# Altium PCB Amplifier.PcbDoc
Units mm, origin at the board's own origin, x right, y up, seen from the top; angles counter-clockwise.
Board outline 76.8 x 27.3 mm, 2 copper layers (Top Layer, Bottom Layer), stack 0.373 mm thick; 49 components, 17 nets, 109 pads, 210 vias.
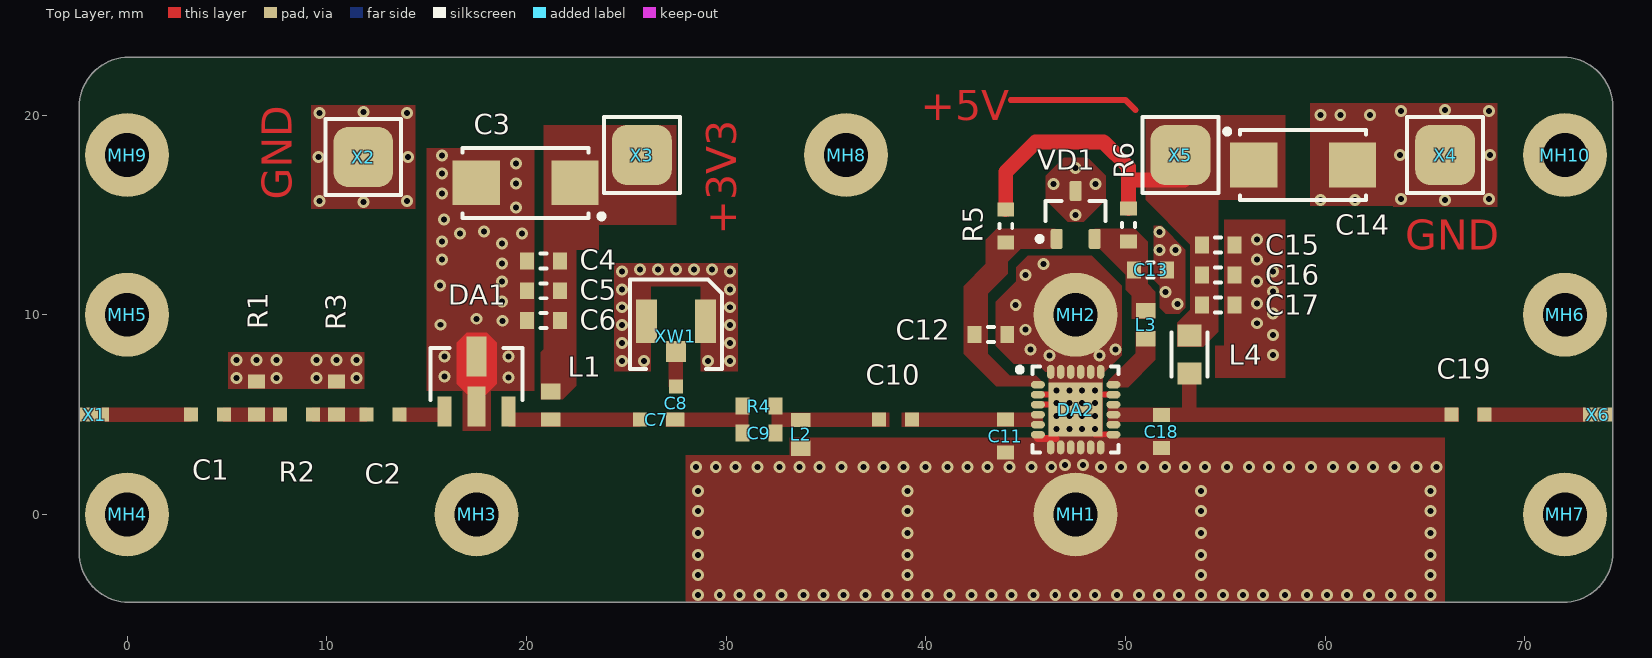
[diagram p0: Top Layer view]
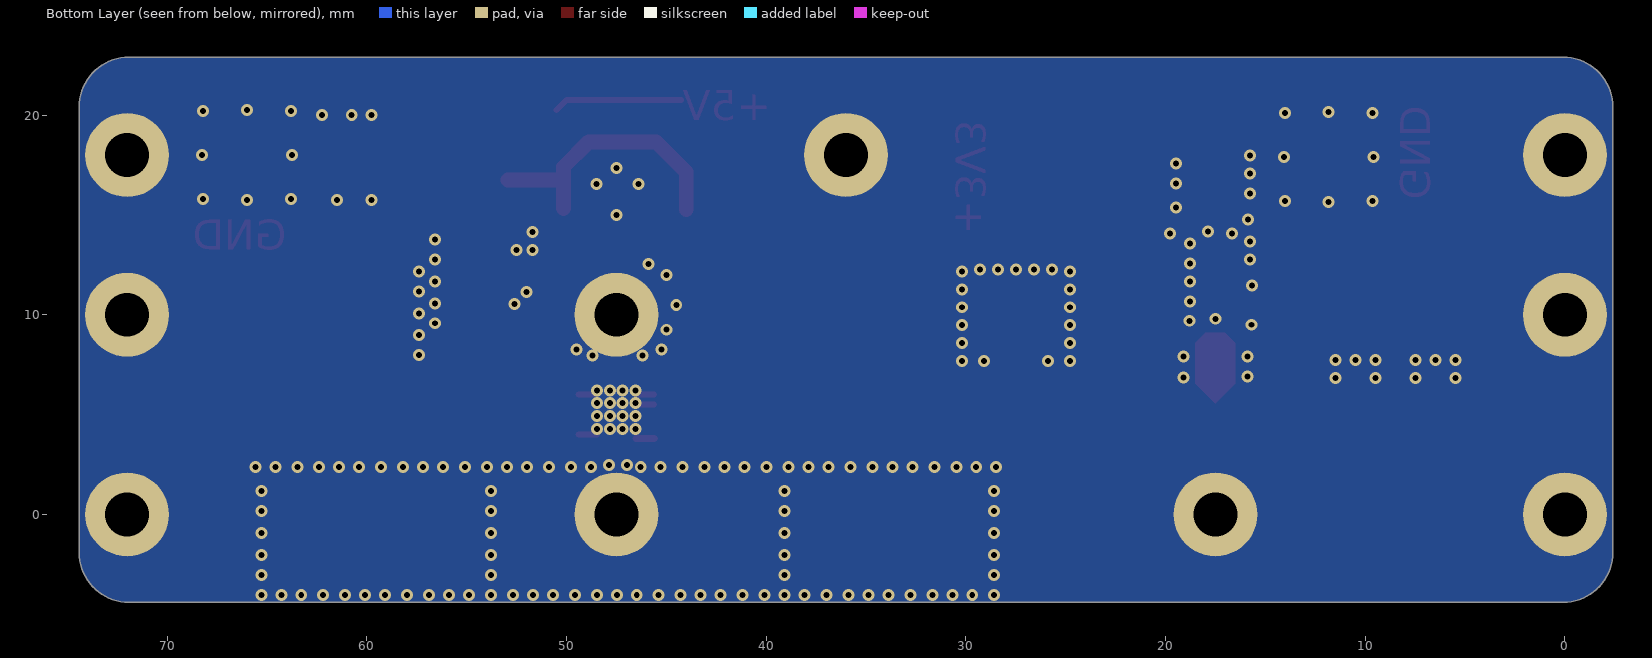
[diagram p1: Bottom Layer view, seen from below]
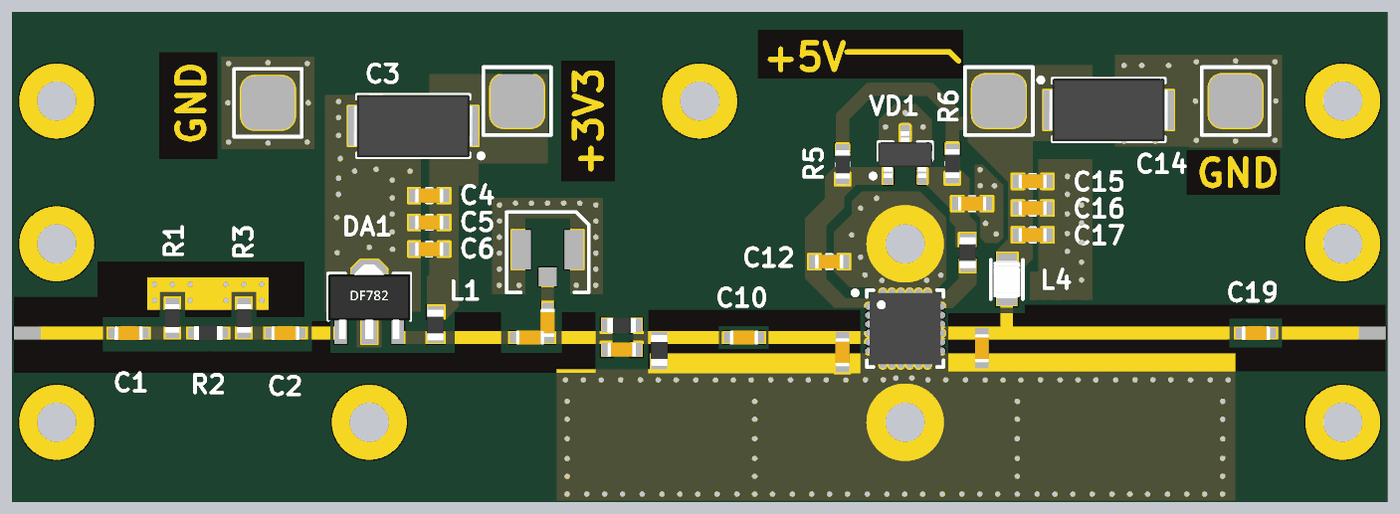
[diagram p2: 3D render of the assembled board from above, using the file's embedded part models]

## Layer stack, top to bottom
Top Solder: solder mask 0.0254, SM-001, Dk 4
Top Layer: signal copper 0.0175
Core: core 0.338, WL-CT350, Dk 3.66
Bottom Layer: signal copper 0.0175

## Board outline
0.1,-4.4 cw(c0.1,-1.9) -2.4,-1.9 -2.4,20.4 cw(c0.1,20.4) 0.1,22.9 71.9,22.9 cw(c71.9,20.4) 74.4,20.4 74.4,-1.9 cw(c71.9,-1.9) 71.9,-4.4

## Design rules (kind name [scope] priority, off if disabled: settings)
BoardOutlineClearance [All] p1: gap=0.3 ignorepadtopadclearanceinfootprint=FALSE except(0: Arc-SplitContinuation Track-SplitContinuation SMDPad-OutlineEdge SMDPad-CutoutEdge SMDPad-SplitContinuation THPad-SplitContinuation Via-SplitContinuation Fill-SplitContinuation Poly-CavityEdge Poly-CutoutEdge Poly-SplitBarrior Poly-SplitContinuation Region-SplitContinuation Text-SplitContinuation; 0.001: Poly-OutlineEdge)
Clearance ClearancePoly [InPoly] p1: gap=0.18 ignorepadtopadclearanceinfootprint=FALSE except(0: Arc-Hole Track-Hole SMDPad-Hole THPad-Hole Via-Hole Fill-Hole Poly-Hole Region-Hole Text-Hole; 0.2: Arc-Fill Arc-Poly Arc-Region Track-Fill Track-Poly Track-Region)
Clearance [All] p2: gap=0.16 ignorepadtopadclearanceinfootprint=TRUE except(0: Arc-Hole Track-Hole SMDPad-Hole THPad-Hole Via-Hole Fill-Hole Poly-Hole Region-Hole Text-Hole)
DiffPairsRouting [All] p1: maxlimit=0.254 minlimit=0.2 mostfreqgap=0.23 toplayer_minwidth=0.2 toplayer_maxwidth=0.381 toplayer_prefwidth=0.205 bottomlayer_minwidth=0.2 bottomlayer_maxwidth=0.381 bottomlayer_prefwidth=0.205 maxuncoupledlength=12.7
HoleSize [All] p1: absolutevalues=TRUE maxlimit=4.5 minlimit=0.025 maxpercent=80.000 minpercent=20.000
MinimumSolderMaskSliver [All] p1: minsoldermaskwidth=0.1
PolygonConnect PolygonConnectDirect [IsVia or IsNamedPolygon('Direct')] p1: connectstyle=Direct reliefconductorwidth=0.254 reliefentries=4 polygonreliefangle="90 Angle" airgapwidth=0.254
PolygonConnect [All] p2: connectstyle=Relief reliefconductorwidth=0.254 reliefentries=4 polygonreliefangle="90 Angle" airgapwidth=0.254
RoomDefinition LNA [InComponentClass('LNA')] p1: confinementstyle=ConfineIn formatcopy=TRUE lockcomponents=FALSE outline 2.274,3.746 2.274,5.754 5.474,5.754 5.474,7.329 9.474,7.329 14.546,7.329 14.546,9.779 15.769,9.779 15.769,18.881 24.762,18.881 24.762,14.323 22.612,14.323 22.612,10.198 22.612,8.698 22.237,8.698 22.237,3.698 20.179,3.698 20.179,3.721 14.546,3.721 2.274,3.721 2.274,3.746
RoomDefinition Power [InComponentClass('Power')] p2: confinementstyle=ConfineIn formatcopy=TRUE lockcomponents=FALSE outline 24.754,3.747 24.754,5.755 24.829,5.755 24.829,12.13 42.996,12.13 42.996,16.204 45.196,16.204 45.196,17.204 54.086,17.204 54.086,19.779 63.079,19.779 63.079,6.004 68.894,6.004 68.894,3.996 52.8,3.996 52.8,2.396 50.354,2.396 44.989,2.396 44.989,2.171 42.981,2.171 42.981,2.272 32.704,2.272 32.704,3.072 29.879,3.072 29.879,3.747
RoutingVias [All] p1: holewidth=0.3 width=0.7 viastyle="Through Hole" minholewidth=0.3 minwidth=0.6 maxholewidth=0.3 maxwidth=0.7
SilkToSilkClearance [All] p1: silktosilkclearance=0.2
SilkToSolderMaskClearance [IsPad] p1: minsilkscreentomaskgap=0.18 clearancetoexposedcopper=TRUE
SolderMaskExpansion SolderMaskExpansion_1 [IsVia] p1: expansion=0.102 istentingtop=TRUE
SolderMaskExpansion [All] p2: expansion=0.07 istentingtop=FALSE
Width [All] p1: maxlimit=1 minlimit=0.2 preferedwidth=0.3
25 further rules are at their usual default settings.

## Classes and differential pairs
component class Power: C7 C8 C9 C10 C11 C12 C13 C14 C15 C16 C17 C18 C19 DA2 L2 L3 L4 R4 R5 R6 VD1 XW1
component class LNA: C1 C2 C3 C4 C5 C6 DA1 L1 R1 R2 R3
net class 50R: NetC1_1 NetC1_2 NetC2_1 NetC2_2 NetC7_1 NetC7_2 NetC8_2 NetC9_1 NetC10_1 NetC18_2 NetC19_2

## Components (designator, comment, footprint, x,y, rotation, side; value= is the part's Value field where it differs from the comment)
C1 "*" CAPC1608X05N#1 4.028,5 r0 top value=100
C2 "*" CAPC1608X05N#1 12.808,5 r0 top value=100
C3 "*" CAPMP6032X25N-C 19.958,16.602 r180 top value=10u
C4 "*" CAPC1608X05N#2 20.858,12.702 r0 top value=1000
C5 "*" CAPC1608X05N#2 20.858,11.202 r0 top value=100
C6 "*" CAPC1608X05N#2 20.858,9.702 r180 top value=22
C7 "*" CAPC1608X05N#1 26.508,4.751 r0 top value=100
C8 "*" CAPC1608X05N#3 27.483,5.576 r90 top value=100
C9 "*" CAPC1608X05N#2 31.633,4.076 r180 top value=22
C10 "*" CAPC1608X05N#1 38.478,4.75 r180 top value=1.8
C11 "*" CAPC1608X05N#2 43.985,3.925 r90 top value=6.8
C12 "*" CAPC1608X05N#2 43.25,9 r180 top value=100
C13 "*" CAPC1608X05N#2 51.25,12.25 r180 top value=0.1u
C14 "*" CAPMP6032X25N-C 58.89,17.5 r0 top value=10u
C15 "*" CAPC1608X05N#2 54.64,13.5 r0 top value=1000
C16 "*" CAPC1608X05N#2 54.64,12 r0 top value=100
C17 "*" CAPC1608X05N#2 54.64,10.5 r180 top value=22
C18 "*" CAPC1608X05N#2 51.796,4.15 r90 top value=5.1
C19 "*" CAPC1608X05N#1 67.14,5 r0 top value=100
DA1 "PGA-102+" SOT89-DF782-160P410X160-3N 17.5,6.5 r90 top
DA2 "TQP7M9104" QFN50P400X400X85_HS-25N 47.5,5.25 r0 top
L1 "I1608" INDC1608X08N#1 21.208,5.452 r270 top value=18n
L2 "I1608" INDC1608X08N#2 33.733,4.026 r270 top value=3.6n
L3 "I1608" INDC1608X08N#3 51,9.5 r270 top value=120n
L4 "LQW2BHN10NJ13L" LQW2BH 53.19,8 r270 top value=10n
MH1 "Винт DIN912 М2" "DIN 912 M2 Electro" 47.5,0 r0 top
MH2 "Винт DIN912 М2" "DIN 912 M2 Electro" 47.5,10 r0 top
MH3 "Винт DIN912 М2" "DIN 912 M2 Electro" 17.5,0 r0 top
MH4 "Винт DIN912 М2" "DIN 912 M2 Electro" 0,0 r0 top
MH5 "Винт DIN912 М2" "DIN 912 M2 Electro" 0,10 r0 top
MH6 "Винт DIN912 М2" "DIN 912 M2 Electro" 72,10 r0 top
MH7 "Винт DIN912 М2" "DIN 912 M2 Electro" 72,0 r0 top
MH8 "Винт DIN912 М2" "DIN 912 M2 Electro" 36,18 r0 top
MH9 "Винт DIN912 М2" "DIN 912 M2 Electro" 0,18 r0 top locked
MH10 "Винт DIN912 М2" "DIN 912 M2 Electro" 72,18 r0 top locked
R1 "R1608" RESC1608X05N#1 6.478,5.825 r90 top value=432
R2 "R1608" RESC1608X05N#2 8.478,5 r180 top value=11.5
R3 "R1608" RESC1608X05N#1 10.478,5.825 r90 top value=432
R4 "R1608" RESC1608X05N#1 31.633,5.426 r180 top value=51
R5 "R1608" RESC1608X05N#1 44,14.45 r90 top value=220
R6 "R1608" RESC1608X05N#1 50.14,14.5 r90 top value=110
VD1 "SM05T1G" SOT95P232X100-3N 47.5,15 r90 top
X1 "EdgeConnector" "Edge 704" -2.4,5 r0 top (schematic designator X5)
X2 "1PINS" 1Pin-3x3 11.828,17.9 r0 top (schematic designator X1)
X3 "1PINS" 1Pin-3x3 25.778,18 r0 top (schematic designator X2)
X4 "1PINS" 1Pin-3x3 66,18 r0 top (schematic designator X3)
X5 "1PINS" 1Pin-3x3 52.75,18 r0 top (schematic designator X4)
X6 "EdgeConnector" "Edge 704" 74.4,5 r180 top
XW1 "TE 1909763-1" "UMCC TE 1909763-1" 27.483,9.676 r0 top (schematic designator XW2)

## Footprints (in the part's own frame and the unit in brackets; to place one, negate y for a bottom-side part, rotate by r counter-clockwise, add the part's x,y. Pads: shape width x height; smd on the part's side, far side on the other; paste and mask are expansions set on the pad)
1Pin-3x3 [mm] "SMD solder point 3x3 mm"
  rrect50% 3x3 smd: 1(0,0)
  silkscreen extent -1.9,-1.9 1.9,1.9
CAPC1608X05N#1 [mm] "Chip Capacitor, 2-Leads, Body 1.60x0.80mm, IPC Medium Density"
  rect 0.7x0.704 smd paste-0.05: 1(-0.825,0) 2(0.825,0)
  body extent -0.8,-0.4 0.8,0.4, height 0.5
CAPC1608X05N#2 [mm] "Chip Capacitor, 2-Leads, Body 1.60x0.80mm, IPC Medium Density"
  rect 0.7x0.85 smd paste-0.05: 1(-0.825,0) 2(0.825,0)
  silkscreen extent -0.15,-0.38 0.15,0.38, body extent -0.8,-0.4 0.8,0.4, height 0.5
CAPC1608X05N#3 [mm] "Chip Capacitor, 2-Leads, Body 1.60x0.80mm, IPC Medium Density"
  rect 0.7x0.85 smd paste-0.05: 1(-0.825,0)
  rect 0.7x0.704 smd paste-0.05: 2(0.825,0)
  body extent -0.8,-0.4 0.8,0.4, height 0.5
CAPMP6032X25N-C [mm] "Molded Capacitor, 2-Leads, Body 6.00x3.20mm, IPC Medium Density"
  rect 2.37x2.23 smd: 1(-2.47,0) 2(2.47,0)
  silkscreen extent -3.93,-1.75 3.15,1.8, body extent -3.37,-1.75 3.37,1.75, height 2.5
"DIN 912 M2 Electro" [mm] "Винт DIN 912 цилиндрическая головка внутренний шестигранник M2"
  round 4.2 hole 2.2 mask+0.07: MH0(0,0)
"Edge 704" [mm] "Полосок 0,704 мм"
  rect 1.5x0.704 smd mask+0.07: 1(0.75,0)
INDC1608X08N#1 [mm] "Chip Inductor, 2-Leads, Body 1.60x0.80mm, IPC Medium Density"
  rect 0.79x0.98 smd paste-0.04 mask+0.07: 1(-0.705,0)
  rect 0.704x0.98 smd paste-0.04 mask+0.07: 2(0.705,0)
  body extent -0.87,-0.48 0.87,0.48, height 0.8
INDC1608X08N#2 [mm] "Chip Inductor, 2-Leads, Body 1.60x0.80mm, IPC Medium Density"
  rect 0.704x0.98 smd paste-0.04 mask+0.07: 1(-0.705,0)
  rect 0.79x0.98 smd paste-0.04 mask+0.07: 2(0.705,0)
  body extent -0.87,-0.48 0.87,0.48, height 0.8
INDC1608X08N#3 [mm] "Chip Inductor, 2-Leads, Body 1.60x0.80mm, IPC Medium Density"
  rect 0.79x0.98 smd paste-0.04 mask+0.07: 1(-0.705,0) 2(0.705,0)
  body extent -0.87,-0.48 0.87,0.48, height 0.8
LQW2BH [mm] "Chip Inductor, 2-Leads, Body 2.0x1.50mm, IPC Medium Density"
  rect 1.1x1.2 smd paste-0.04 mask+0.07: 1(-0.95,0) 2(0.95,0)
  silkscreen extent -1.1,-0.9 1.1,0.9, body extent -1.05,-0.75 1.05,0.75, height 1.7
QFN50P400X400X85_HS-25N [mm] "QFN, 24-Leads, Body 4,00x4,00mm, Pitch 0,50mm, Thermal Pad 2,70x2,70mm, IPC Medium Density"
  oval 0.7x0.38 smd: 1(-1.89,1.25) 2(-1.89,0.75) 3(-1.89,0.25) 4(-1.89,-0.25) 5(-1.89,-0.75) 6(-1.89,-1.25) 13(1.89,-1.25) 14(1.89,-0.75) 15(1.89,-0.25) 16(1.89,0.25) 17(1.89,0.75) 18(1.89,1.25)
  oval 0.38x0.7 smd: 7(-1.25,-1.89) 8(-0.75,-1.89) 9(-0.25,-1.89) 10(0.25,-1.89) 11(0.75,-1.89) 12(1.25,-1.89) 19(1.25,1.89) 20(0.75,1.89) 21(0.25,1.89) 22(-0.25,1.89) 23(-0.75,1.89) 24(-1.25,1.89)
  rect 2.7x2.7 smd: 25(0,0)
  silkscreen extent -2.92,-2.15 2.15,2.15, body extent -2.01,-2.01 2.01,2.01, height 0.85
RESC1608X05N#1 [mm] "Chip Resistor, 2-Leads, Body 1.60x0.80mm, IPC Medium Density"
  rect 0.7x0.85 smd paste-0.05: 1(-0.825,0) 2(0.825,0)
  body extent -0.8,-0.4 0.8,0.4, height 0.45
RESC1608X05N#2 [mm] "Chip Resistor, 2-Leads, Body 1.60x0.80mm, IPC Medium Density"
  rect 0.7x0.704 smd paste-0.05: 1(-0.825,0) 2(0.825,0)
  body extent -0.8,-0.4 0.8,0.4, height 0.45
SOT89-DF782-160P410X160-3N [mm] "SOT89, 3-Leads, Body 4,50x2,45mm, Pitch 1,60mm, Lead Span 4,1mm, IPC Medium Density"
  rect 1.5x0.7 smd: 1(-1.35,1.6) 3(-1.35,-1.6)
  rect 2x0.9 smd: 2(-1.1,0)
  rect 2x1 smd mask+0.07: 4(1.4,0)
  Top Layer region: -0.95,0 0.05,1 2.1,1 2.6,0.5 2.6,-0.5 2.1,-1 0.05,-1
  silkscreen extent -0.76,-2.3 1.84,2.3, body extent -1.84,-2.3 2.36,2.3, height 1.6
SOT95P232X100-3N [mm] "SOT23, 3-Leads, Body 2.92x2.32mm, Pitch 0.95mm, IPC Medium Density"
  rrect30% 1x0.6 smd paste-0.03: 1(-1.2,0.95) 2(-1.2,-0.95) 3(1.2,0)
  silkscreen extent -1.32,-1.5 0.7,1.92, body extent -1.32,-1.52 1.32,1.52, height 1
"UMCC TE 1909763-1" [mm]
  rect 1x1.05 smd mask+0.07: 1(0,-1.525)
  rect 1.05x2.2 smd mask+0.07: 2(-1.475,0) 2(1.475,0)
  Top Layer pour cut-out: -0.95,-1 -0.95,1.5 0.95,1.5 0.95,-1
  silkscreen extent -2.3,-2.4 2.3,2.1, body extent -1.5,-1.55 1.5,1.55, height 1.23

## Part data
C1 C2 C5 C7 C8 C12 C16 C19: library part CC1608, "Конденсатор 1.6x0.8 мм", Manufacturer="Murata Electronics", Manufacturer Part Number=GCM1885C2A101FA16D, Supplier Part Number 1=C527967, Tolerance=±1%, Voltage=100, Supplier 1=LCSC, РКД Наименование="CC1608M - NP0 - 100 V - 100 pF ±1%", ТКЕ=C0G
  C1 C2 C5: ClassName=LNA
  C7 C8 C12 C16 C19: ClassName=Power
C3 C14: library part CT6032-C, "Tantalum Surface Mount Capacitor, Size C", Manufacturer="Vishay Intertech", Manufacturer Part Number=293D106X9016C2TE3, Supplier Part Number 1=C130372, Voltage=16, Supplier 1=LCSC
  C3: ClassName=LNA
  C14: ClassName=Power
C4 C15: library part CC1608, "Конденсатор 1.6x0.8 мм", Manufacturer="Murata Electronics", Manufacturer Part Number=GRM1885C1H102JA01D, Supplier Part Number 1=C77026, Tolerance=±5%, Voltage=50, Supplier 1=LCSC, РКД Наименование="CC1608M - NP0 - 50 V - 1 nF ±5%", ТКЕ=C0G
  C4: ClassName=LNA
  C15: ClassName=Power
C6 C9 C17: library part CC1608, "Конденсатор 1.6x0.8 мм", Manufacturer="Vishay Intertech", Manufacturer Part Number=VJ0603A220FXACW1BC, Supplier Part Number 1=C2182228, Tolerance=±1%, Voltage=50, Supplier 1=LCSC, РКД Наименование="CC1608M - NP0 - 50 V - 22 pF ±1%", ТКЕ=C0G
  C6: ClassName=LNA
  C9 C17: ClassName=Power
C10: library part CC1608, "Конденсатор 1.6x0.8 мм", Manufacturer=YAGEO, Manufacturer Part Number=CC0603BRNPO9BN1R8, Supplier Part Number 1=C282244, Tolerance="±0.1 pF", Voltage=50, ClassName=Power, Supplier 1=LCSC, РКД Наименование="CC1608M - NP0 - 50 V - 1.8 pF ±0.1pF", ТКЕ=C0G
C11: library part CC1608, "Конденсатор 1.6x0.8 мм", Manufacturer=YAGEO, Manufacturer Part Number=CC0603BRNPO9BN6R8, Supplier Part Number 1=C519114, Tolerance=±0.1pF, Voltage=50, ClassName=Power, Supplier 1=LCSC, РКД Наименование="CC1608M - NP0 - 50 V - 6.8 pF ±0.1 pF", ТКЕ=C0G
C13: library part CC1608, "Конденсатор 1.6x0.8 мм", Manufacturer="Murata Electronics", Manufacturer Part Number=GRM188R71H104KA93D, Supplier Part Number 1=C77055, Tolerance=±10%, Voltage=50, ClassName=Power, Supplier 1=LCSC, РКД Наименование="CC1608M -X7R - 50 V - 0.1 uF ±10%", ТКЕ=X7R
C18: library part CC1608, "Конденсатор 1.6x0.8 мм", Manufacturer=YAGEO, Manufacturer Part Number=CC0603BRNPO9BN5R1, Supplier Part Number 1=C519110, Tolerance="±0.1 pF", Voltage=50, ClassName=Power, Supplier 1=LCSC, РКД Наименование="CC1608M - NP0 - 50 V - 5.1 pF ±0.1 pF", ТКЕ=C0G
DA1: "MonolithicAmplifier, UltraHighDynamicRange, 50ohm, 0.05 to 6 GHz", Manufacturer=Mini-Circuits, Supplier Part Number 1=C3193264, Category="RF Amplifiers", ClassName=LNA, Manufacturer Part Number=PGA-102+, Pricing 1="1=3,25, 10=3,1, 20=2,952, 50=2,112, 100=2,028, 200=1,944, 500=1,86 (USD)", RoHS=Yes, RoHS Compliant=Yes, Stock 1=4202, Supplier 1=LCSC
DA2: "RF Amp Single Driver Amp 2.2GHz 5.25V 24-Pin QFN EP", Manufacturer=Qorvo, Supplier Part Number 1=C471175, Category="RF Amplifiers", ClassName=Power, Manufacturer Part Number=TQP7M9104, Pricing 1="1=17,08, 10=17,08, 50=12,4, 100=10,06, 1000=6,78, 10000=6,65 (USD)", RoHS=Yes, Stock 1=3113, Supplier 1=LCSC
L1: "Катушка 1.6x0.8 мм", Manufacturer=FH, Manufacturer Part Number=FHW0603UC018JST, Supplier Part Number 1=C295695, ClassName=LNA, Supplier 1=LCSC
L2: "Катушка 1.6x0.8 мм", Manufacturer=FH, Manufacturer Part Number=FHW0603UC3N6JST, Supplier Part Number 1=C304270, ClassName=Power, Supplier 1=LCSC
L3: "Катушка 1.6x0.8 мм", Manufacturer=FH, Manufacturer Part Number=FHW0603UCR12JST, Supplier Part Number 1=C317988, ClassName=Power, Supplier 1=LCSC
L4: "Inductor RF Chip Wirewound 10nH 5% 100MHz 35Q-Factor 1.32A 30mOhm DCR 0805 Embossed T/R", Case Code (Imperial)=0805, Case Code (Metric)=2012, Current Rating=1.32A, DC Resistance (DCR)=30mR, Inductance=10n, Manufacturer=Murata, Max Operating Temperature=85°C, Min Operating Temperature=-40°C, Package Quantity=2000, Self Resonant Frequency=3.3GHz, Supplier Part Number 1=490-11779-1-ND, Test Frequency=100MHz, Tolerance=5%, Case/Package=0805, Category="Fixed Inductors", ClassName=Power, ComponentLink1Description=https://datasheet.ciiva.com/30490/0900766b81256294-30490160.pdf?src-supplier=Rs, ComponentLink1URL=https://datasheet.ciiva.com/30490/0900766b81256294-30490160.pdf?src-supplier=Rs, ComponentLink2Description=https://datasheet.ciiva.com/8508/l0075s0081lqw2bh-13-8508518.pdf?src-supplier=Avnet, ComponentLink2URL=https://datasheet.ciiva.com/8508/l0075s0081lqw2bh-13-8508518.pdf?src-supplier=Avnet, Core Material=Non-Magnetic,Ferrite, DC Current=1.32A, Depth=1.7mm, Height=1.7mm, Height - Seated (Max)=0.07inch, Length=2mm, Manufacturer Part Number=LQW2BHN10NJ13L, Max DC Current=1.32A, Military Standard=Not, Mount="Surface Mount", Packaging="Tape and Reel", Pricing 1="1=0,41, 10=0,334, 25=0,3088, 50=0,283, 100=0,2495, 250=0,2418, 500=0,21608, 1000=0,17492 (USD)", Q Factor=35, Radiation Hardening=No, RoHS=Yes, RoHS Compliant=Yes, Series=LQW2BH_13, Shielding=Unshielded, Stock 1=1980, Supplier 1=Digikey, Termination=SMD/SMT, Weight=0.000317oz, Width=0.059inch
MH1 MH2 MH3 MH4 MH5 MH6 MH7 MH8 MH9 MH10: library part "Винт DIN 912 М2", "Винт DIN 912 цилиндрическая головка внутренний шестигранник М2"
R1 R3: "Резистор 1.6x0.8 мм", Manufacturer=YAGEO, Manufacturer Part Number=RC0603FR-07432RL, Supplier Part Number 1=C245969, Tolerance=±1%, ClassName=LNA, Supplier 1=LCSC, РКД Наименование="RC1608M - 432 Ohm ±1%"
R2: "Резистор 1.6x0.8 мм", Manufacturer=YAGEO, Manufacturer Part Number=RC0603FR-0711R5L, Supplier Part Number 1=C245901, Tolerance=±1%, ClassName=LNA, Supplier 1=LCSC, РКД Наименование="RC1608M - 11.5 Ohm ±1%"
R4: "Резистор 1.6x0.8 мм", Manufacturer=YAGEO, Manufacturer Part Number=RC0603FR-0751RL, Supplier Part Number 1=C114628, Tolerance=±1%, ClassName=Power, Supplier 1=LCSC, РКД Наименование="RC1608M - 51 Ohm ±1%"
R5: "Резистор 1.6x0.8 мм", Manufacturer=YAGEO, Manufacturer Part Number=RC0603FR-07220RL, Supplier Part Number 1=C107696, Tolerance=±1%, ClassName=Power, Supplier 1=LCSC, РКД Наименование="RC1608M - 220 Ohm ±1%"
R6: "Резистор 1.6x0.8 мм", Manufacturer=YAGEO, Manufacturer Part Number=RC0603FR-07110RL, Supplier Part Number 1=C141676, Tolerance=±1%, ClassName=Power, Supplier 1=LCSC, РКД Наименование="RC1608M - 110 Ohm ±1%"
VD1: "SM05T1 Series 7.3 V 300 W Transient Voltage Suppressor Diode Array - SOT-23-3", Manufacturer=UMW, Supplier Part Number 1=C5199846, Voltage Rating (DC)=5V, Category="ESD and Circuit Protection ICs", ClassName=Power, ComponentLink1Description=https://datasheet.ciiva.com/11193/sm12t1-d-11193492.pdf?src-supplier=Avnet, ComponentLink1URL=https://datasheet.ciiva.com/11193/sm12t1-d-11193492.pdf?src-supplier=Avnet, ComponentLink2Description=https://datasheet.ciiva.com/4508/sm12t1-d-196357-4508787.pdf?src-supplier=Mouser, ComponentLink2URL=https://datasheet.ciiva.com/4508/sm12t1-d-196357-4508787.pdf?src-supplier=Mouser, ComponentLink3Description=https://datasheet.ciiva.com/15143/getdatasheetpartid-69008-15143230.pdf?src-supplier=Verical, ComponentLink3URL=https://datasheet.ciiva.com/15143/getdatasheetpartid-69008-15143230.pdf?src-supplier=Verical, ComponentLink4Description=https://datasheet.ciiva.com/11193/sm12t1-d-11193495.pdf?src-supplier=Avnet, ComponentLink4URL=https://datasheet.ciiva.com/11193/sm12t1-d-11193495.pdf?src-supplier=Avnet, ComponentLink5Description=https://datasheet.ciiva.com/339/sm05t1-d-339928.pdf?src-supplier=Digikey, ComponentLink5URL=https://datasheet.ciiva.com/339/sm05t1-d-339928.pdf?src-supplier=Digikey, ComponentLink6Description=https://datasheet.ciiva.com/339/sm05t1-d-339929.pdf?src-supplier=Digikey, ComponentLink6URL=https://datasheet.ciiva.com/339/sm05t1-d-339929.pdf?src-supplier=Digikey, ComponentLink7Description=https://datasheet.ciiva.com/339/sm05t1-d-339930.pdf?src-supplier=Digikey, ComponentLink7URL=https://datasheet.ciiva.com/339/sm05t1-d-339930.pdf?src-supplier=Digikey, ComponentLink8Description=https://datasheet.ciiva.com/22661/1708353-22661174.pdf?src-supplier=Element14, ComponentLink8URL=https://datasheet.ciiva.com/22661/1708353-22661174.pdf?src-supplier=Element14, ComponentLink9Description=https://datasheet.ciiva.com/16199/sm12t1-d-16199269.pdf?src-supplier=Future+Electronics, ComponentLink9URL=https://datasheet.ciiva.com/16199/sm12t1-d-16199269.pdf?src-supplier=Future+Electronics, Lead Free=5697LeadFree, Manufacturer Part Number=SM05T1G, Pricing 1="1=0,34, 10=0,207, 100=0,1296, 500=0,09596, 1000=0,08508 (USD)", RoHS=Yes, Stock 1=80742, Supplier 1=LCSC
X1 X6: "Полосок для подключения СВЧ контакта"
X2 X3 X4 X5: "Точки пайки с отверстием и без"
XW1: library part "Разъем UMCC TE 1909763-1", "Разъем UMCC, микрополосок", Case/Package=SMD/SMT, Dielectric Material=Polymer, Frequency=6GHz, Housing Color=Beige, Manufacturer="TE Connectivity AMP", Manufacturer Part Number=1909763-1, Max Operating Temperature=194°C, Min Operating Temperature=-40°C, Package Quantity=1, Supplier Part Number 1=C392444, Body Material="Liquid Crystal Polymer,Polymer", Body Plating=Gold, ClassName=Power, ComponentLink1Description=http://www.te.com/commerce/DocumentDelivery/DDEController?Action=showdoc&DocId=Customer+Drawing%7F1909763%7FB%7Fpdf%7FEnglish%7FENG_CD_1909763_B.pdf%7F1909763-1&src-supplier=Future+Electronics, ComponentLink1URL=http://www.te.com/commerce/DocumentDelivery/DDEController?Action=showdoc&DocId=Customer+Drawing%7F1909763%7FB%7Fpdf%7FEnglish%7FENG_CD_1909763_B.pdf%7F1909763-1&src-supplier=Future+Electronics, ComponentLink2Description=http://www.te.com/commerce/DocumentDelivery/DDEController?Action=showdoc&DocId=Customer+Drawing%7F1909763%7FB%7Fpdf%7FEnglish%7FENG_CD_1909763_B.pdf%7F1909763-1&src-supplier=Avnet+Asia, ComponentLink2URL=http://www.te.com/commerce/DocumentDelivery/DDEController?Action=showdoc&DocId=Customer+Drawing%7F1909763%7FB%7Fpdf%7FEnglish%7FENG_CD_1909763_B.pdf%7F1909763-1&src-supplier=Avnet+Asia, ComponentLink3Description=http://www.te.com/commerce/DocumentDelivery/DDEController?Action=showdoc&DocId=Customer+Drawing%7F1909763%7FB%7Fpdf%7FEnglish%7FENG_CD_1909763_B.pdf%7F1909763-1&src-supplier=Avnet, ComponentLink3URL=http://www.te.com/commerce/DocumentDelivery/DDEController?Action=showdoc&DocId=Customer+Drawing%7F1909763%7FB%7Fpdf%7FEnglish%7FENG_CD_1909763_B.pdf%7F1909763-1&src-supplier=Avnet, ComponentLink4Description=https://www.te.com/commerce/DocumentDelivery/DDEController?Action=srchrtrv&DocNm=1909763&DocType=Customer+Drawing&DocLang=English&src-supplier=Digi-Key, ComponentLink4URL=https://www.te.com/commerce/DocumentDelivery/DDEController?Action=srchrtrv&DocNm=1909763&DocType=Customer+Drawing&DocLang=English&src-supplier=Digi-Key, Connector System=Cable-to-Board, Connector Type=Jack, Contact Material="Copper Alloy", Contact Plating=Gold, ELV=Compliant, Fastening Type=Pull,Push, Gender=Female, Impedance=50R, Insulation Material=Thermoplastic, Lead Free="Lead Free", Length=3mm, Max Frequency=6GHz, Mount=Panel, Number of Positions=1, Orientation=Straight, Packaging="Tape and Reel", Pricing 1="1=0.5, 10=0.472, 100=0.3615, 500=0.3144, 1000=0.2594 (USD)", Radiation Hardening=No, Sealable="No (Without)", Stock 1=119207, Supplier 1=LCSC, Termination=SMD/SMT, РКД Наименование="1909763-1 - UMCC разъем, TE Connectivity"

## Via types
v1: diameter 0.6, hole 0.3, Top Layer to Bottom Layer, tented both sides, 210 vias

## Nets (pads, with @x,y where several pads share a name; then routed paths per layer and width w, separated by ;. In a path a pad name is that pad's centre, name@x,y a point inside that pad or via, vN(x,y) a via of type N, cw(c..) or ccw(c..) an arc to the next point about the centre after c; other vN are vias at no path point)
+3.3V: C3.1 C4.2 C5.2 C6.1 L1.1 X3.1
+5V: C14.1 C15.1 C16.1 C17.2 L4.1 R5.2 R6.2 X5.1 | length 14.1
  Top Layer w0.75: R5.2 44,17.15 45.5,18.65 48.9,18.65 50.14,17.41 50.14,16.65 ; R6.2 50.14,16.65 ; X5.1@52.92,16.75 50.24,16.75 50.14,16.65
GND: C3.2 C4.1 C5.1 C6.2 C11.1 C12.1 C13.1 C14.2 C15.2 C16.2 C17.1 C18.1 DA1.2 DA1.4 DA2.2 DA2.3 DA2.6 DA2.7 DA2.8 DA2.9 DA2.10 DA2.11 DA2.12 DA2.13 DA2.17 DA2.19 DA2.20 DA2.21 DA2.22 DA2.23 DA2.24 DA2.25 L2.2 MH1.MH0 MH2.MH0 MH3.MH0 MH4.MH0 MH5.MH0 MH6.MH0 MH7.MH0 MH8.MH0 MH9.MH0 MH10.MH0 R1.2 R3.2 VD1.3 X2.1 X4.1 XW1.2 | length 4.6
  Top Layer w0.3: DA2.3 DA2.25@46.54,5.5 ; DA2.2 DA2.25@46.54,6 ; DA2.25@48.46,4 DA2.13 ; DA2.25@48.46,6 DA2.17
  Top Layer w0.35: DA2.6@45.588,3.81 46.518,3.81
  other v1: 28.578,-4.025 29.678,-4.025 30.678,-4.025 31.678,-4.025 32.778,-4.025 33.878,-4.025 34.878,-4.025 35.878,-4.025 36.978,-4.025 38.078,-4.025 39.078,-4.025 40.078,-4.025 41.178,-4.025 42.278,-4.025 43.278,-4.025 44.278,-4.025 45.378,-4.025 46.478,-4.025 47.478,-4.025 48.478,-4.025 49.578,-4.025 50.678,-4.025 51.678,-4.025 52.678,-4.025 53.778,-4.025 54.878,-4.025 55.878,-4.025 56.878,-4.025 57.978,-4.025 59.078,-4.025 60.078,-4.025 61.078,-4.025 62.178,-4.025 63.278,-4.025 64.278,-4.025 65.278,-4.025 28.578,-3.025 39.078,-3.025 53.778,-3.025 65.278,-3.025 28.578,-2.025 39.078,-2.025 53.778,-2.025 65.278,-2.025 28.578,-0.925 39.078,-0.925 53.778,-0.925 65.278,-0.925 28.578,0.175 39.078,0.175 53.778,0.175 65.278,0.175 28.578,1.175 39.078,1.175 53.778,1.175 65.278,1.175 28.478,2.375 29.478,2.375 30.478,2.375 31.578,2.375 32.678,2.375 33.678,2.375 34.678,2.375 35.778,2.375 36.878,2.375 37.878,2.375 38.878,2.375 39.978,2.375 41.078,2.375 42.078,2.375 43.078,2.375 44.178,2.375 45.278,2.375 46.278,2.375 48.778,2.375 49.778,2.375 50.878,2.375 51.978,2.375 52.978,2.375 53.978,2.375 55.078,2.375 56.178,2.375 57.178,2.375 58.178,2.375 59.278,2.375 60.378,2.375 61.378,2.375 62.378,2.375 63.478,2.375 64.578,2.375 65.578,2.375 46.978,2.475 47.878,2.475 46.54,4.29 47.19,4.29 47.82,4.29 48.46,4.29 46.54,4.93 47.19,4.93 47.82,4.93 48.46,4.93 46.54,5.57 47.19,5.57 47.82,5.57 48.46,5.57 46.54,6.21 47.19,6.21 47.82,6.21 48.46,6.21 5.478,6.825 7.478,6.825 9.478,6.825 11.478,6.825 19.1,6.852 15.9,6.9 24.783,7.676 25.883,7.676 29.083,7.676 30.183,7.676 5.478,7.725 6.478,7.725 7.478,7.725 9.478,7.725 10.478,7.725 11.478,7.725 15.9,7.9 19.1,7.9 46.2,7.95 48.7,7.95 57.378,7.975 45.25,8.25 49.5,8.25 24.783,8.576 30.183,8.576 57.378,8.975 45,9.25 24.783,9.476 30.183,9.476 15.7,9.5 56.578,9.575 18.8,9.7 17.5,9.8 57.378,10.075 24.783,10.376 30.183,10.376 44.5,10.5 52.6,10.55 56.578,10.575 18.778,10.675 52,11.15 57.378,11.175 24.783,11.276 30.183,11.276 15.678,11.475 18.778,11.675 56.578,11.675 45,12 24.783,12.176 30.183,12.176 57.378,12.175 25.683,12.276 26.583,12.276 27.483,12.276 28.383,12.276 29.283,12.276 45.9,12.55 18.778,12.575 15.778,12.775 56.578,12.775 51.7,13.25 52.5,13.25 18.778,13.575 15.778,13.675 56.578,13.775 16.678,14.075 19.778,14.075 51.7,14.15 17.878,14.175 15.878,14.775 47.5,15 19.478,15.375 11.828,15.65 9.628,15.7 14.028,15.7 59.75,15.75 61.5,15.75 66,15.75 63.8,15.8 68.2,15.8 15.778,16.075 46.4,16.55 48.5,16.55 19.478,16.575 15.778,17.075 47.5,17.35 19.478,17.575 9.578,17.9 14.078,17.9 15.778,17.975 63.75,18 68.25,18 59.75,20 60.75,20 62.25,20 9.628,20.1 14.028,20.1 11.828,20.15 63.8,20.2 68.2,20.2 66,20.25
NetC1_1: C1.1 X1.1
NetC1_2: C1.2 R1.1 R2.2
NetC2_1: C2.1 R2.1 R3.1
NetC2_2: C2.2 DA1.1
NetC7_1: C7.1 DA1.3 L1.2
NetC7_2: C7.2 C8.1 C9.2 R4.2
NetC8_2: C8.2 XW1.1
NetC9_1: C9.1 C10.2 L2.1 R4.1
NetC10_1: C10.1 C11.2 DA2.4 DA2.5
NetC12_2: C12.2 DA2.1 R5.1 VD1.1
NetC13_2: C13.2 L3.1 R6.1 VD1.2
NetC18_2: C18.2 C19.1 DA2.14 DA2.15 DA2.16 L4.2
NetC19_2: C19.2 X6.1
NetDA2_18: DA2.18 L3.2
copper on no net: | length 6.5
  Top Layer w0.3: 44.25,20.75 50,20.75 50.5,20.25

## Polygon pours and split planes (outlines as drawn)
NetC10_1 on Top Layer "Direct" (solid, remove dead copper, pour order 0): 45.848,4.4 45.848,5.102 38.798,5.102 38.798,4.398
NetC9_1 on Top Layer "Direct" (solid, remove dead copper, pour order 1): 38.158,4.4 38.158,5.102 32.278,5.102 32.278,4.398
NetC7_2 on Top Layer "Direct" (solid, remove dead copper, pour order 2): 31.108,4.398 31.108,5.102 26.983,5.102 26.983,4.398
NetC18_2 on Top Layer "Direct" (solid, remove dead copper, pour order 3): 49.113,5.352 49.113,4.648 66.69,4.648 66.69,5.352
NetC18_2 on Top Layer "Direct" (solid, remove dead copper, pour order 4): 52.838,4.723 53.542,4.723 53.542,7.05 52.838,7.05
NetC8_2 on Top Layer "Direct" (solid, remove dead copper, pour order 5): 27.131,6.401 27.835,6.401 27.835,8.151 27.131,8.151
NetC19_2 on Top Layer "Direct" (solid, remove dead copper, pour order 8): 67.615,5.352 67.615,4.648 73.2,4.648 73.2,5.352
NetC7_1 on Top Layer "Direct" (solid, remove dead copper, pour order 9): 19.1,4.398 19.1,5.102 25.708,5.102 25.708,4.398
NetC2_2 on Top Layer "Direct" (solid, remove dead copper, pour order 10): 15.958,4.648 15.958,5.352 13.703,5.352 13.703,4.648
NetC2_1 on Top Layer "Direct" (solid, remove dead copper, pour order 11): 12.008,4.648 12.008,5.352 9.278,5.352 9.278,4.648
NetC1_2 on Top Layer "Direct" (solid, remove dead copper, pour order 12): 7.653,4.648 7.653,5.352 4.828,5.352 4.828,4.648
NetDA2_18 on Top Layer "Direct" (solid, remove dead copper, pour order 13): 49.141,6.381 50.131,6.381 51.49,7.74 51.49,9.19 50.51,9.19 50.51,8.072 49.141,6.703
+5V on Top Layer "Direct" (solid, remove dead copper, pour order 14): 52.59,8.4 53.9,8.4 54.64,9.14 54.64,20 51,20 51,15.75 53.25,13.5 53.25,10.25 52.59,9.59
NetC13_2 on Top Layer "Direct" (solid, remove dead copper, pour order 15): 50.45,14.3 51.1,13.65 51.1,11.55 51.49,11.16 51.49,9.81 50.3,9.81 50.3,10.95 50,11.25 50,12 48.7,13.3 48.45,13.3 48.45,14.3
GND on Top Layer "Direct" (solid, remove dead copper, pour order 17): 51.4,12.625 51.4,11.75 51.7,11.45 51.7,10.35 52,10.05 52.7,10.05 53,10.35 53,13.25 51.8,14.45 51.4,14.45
NetC12_2 on Top Layer "Direct" (solid, remove dead copper, pour order 18): 46.624,14.3 43.55,14.3 43,13.75 43,12.55 41.886,11.436 41.886,8.05 43.1,8.05 43.1,11.05 44.1,12.05 44.1,12.65 44.75,13.3 46.604,13.3
NetC12_2 on Top Layer "Direct" (solid, remove dead copper, pour order 19): 46.048,6.416 43.519,6.416 41.886,8.05 41.886,8.575 42.575,8.575 44.2,6.95 45.514,6.95
GND on Top Layer "Direct" (solid, remove dead copper, pour order 20): 48.3,12.95 49.8,11.45 49.8,7.975 48.965,7.14 45.985,7.14 45.575,7.55 44.4,7.55 43.5,8.45 43.5,10.65 44.52,11.67 44.52,12.37 45.1,12.95 47.2,12.95
NetC1_1 on Top Layer "Direct" (solid, remove dead copper, pour order 21): 3.203,4.648 3.203,5.352 -1.4,5.352 -1.4,4.648
+3.3V on Top Layer "Direct" (solid, remove dead copper, pour order 22): 21.812,5.762 22.5,6.45 22.5,13.25 23.613,13.25 23.613,19.5 20.858,19.5 20.858,8.275 20.718,8.135 20.718,5.762
GND on Top Layer "Direct" (solid, remove dead copper, pour order 23): 48.1,17.85 49,16.95 49,15.75 47.9,14.65 47.1,14.65 46,15.75 46,16.95 46.9,17.85
GND on Top Layer "Direct" (solid, remove dead copper, pour order 25): 33.19,3.848 33.19,-4.65 65.978,-4.65 65.978,3.848
GND on Top Layer "Direct" (solid, remove dead copper, pour order 26): 54.49,6.852 58,6.852 58,14.75 54.947,14.75 54.947,8.452 54.49,8.452
GND on Top Layer "Direct" (solid, remove dead copper, pour order 27): 33.733,2.976 27.983,2.976 27.983,-4.65 33.733,-4.65
GND on Top Layer "Direct" (solid, remove dead copper, pour order 28): 16.8,4.2 16.8,6.2 15,6.2 15,10.3 20.383,10.3 20.383,6.2 18.2,6.2 18.2,4.2
GND on Top Layer "Direct" (solid, remove dead copper, pour order 29): 20.383,9.9 20.383,18.35 15,18.35 15,15.25 15,9.9
GND on Top Layer "Direct" (solid, remove dead copper, pour order 31): 11.878,6.3 5.078,6.3 5.078,8.125 11.878,8.125
GND on Top Layer "Direct" (solid, remove dead copper, pour order 32): 59.25,15.45 59.25,20.6 63.75,20.6 63.75,15.45
GND on Top Layer "Direct" (solid, remove dead copper, pour order 33): 24.383,7.176 24.383,12.576 30.583,12.576 30.583,7.176 28.733,7.176 28.733,11.426 26.233,11.426 26.233,7.176
GND on Top Layer "Direct" (solid, remove dead copper, pour order 34): 46.15,3.36 46.15,7.675 48.85,7.675 48.85,3.36
GND on Top Layer "Direct" (solid, remove dead copper, pour order 36): 9.228,20.5 9.228,15.3 14.428,15.3 14.428,20.5
+5V on Top Layer "Direct" (solid, remove dead copper, pour order 37): 54,20 58,20 58,15.75 54,15.75
+3.3V on Top Layer "Direct" (solid, remove dead copper, pour order 38): 22.75,19.5 27.5,19.5 27.5,14.5 22.75,14.5
GND on Top Layer "Direct" (solid, remove dead copper, pour order 41): 63.4,20.6 63.4,15.4 68.6,15.4 68.6,20.6
GND on Bottom Layer "Direct" (solid, remove dead copper, pour order 16): -2.4,-4.65 -2.4,25.15 74.4,25.15 74.4,-4.65

## Other copper
Top Layer:
  text "+5V" at 39.751,19.75 h1.5
  text "GND" at 8.25,15.751 h1.5 r90
  text "+3V3" at 30.5,14.001 h1.5 r90
  text "GND" at 64.001,13.25 h1.5

## Silkscreen, mask and mechanical layers (free items; w line width, h text height)
Top Solder:
  rectangle: 39.25,19.25 50.75,22
  rectangle: 5.75,14.75 9,20.75
  rectangle: 28.25,13.5 31.25,20.25
  region: 63.25,15.25 63.25,12.75 68.5,12.75 68.5,15.25
  rectangle: 66.54,4.6 68.04,5.4
  rectangle: 25.578,4.35 27.478,5.15
  rectangle: 12.278,4.6 13.578,5.4
  rectangle: 3.178,4.6 5.078,5.4
  rectangle: 7.678,4.6 9.278,5.4
  rectangle: 37.278,4.35 39.378,5.15
  rectangle: -2.4,3.326 0,6.426
  rectangle: -2.4,5.526 -0.217,7.026
  rectangle: -2.4,2.776 -0.217,4.426
  rectangle: -0.617,2.776 2.583,7.026
  rectangle: 72.883,3.676 74.4,6.6
  rectangle: 71.883,5.555 74.4,6.6
  rectangle: 71.75,2.85 74.4,6.6
  rectangle: 68.59,2.85 72.483,6.6
  rectangle: 54.213,5.8 69.413,6.6
  rectangle: 65.013,2.85 69.613,4.2
  rectangle: 39.851,2.75 44.996,6.3
  rectangle: 36.313,5.4 40.613,6.3
  rectangle: 36.613,2.75 40.213,4.1
  rectangle: 33.113,2.75 37.06,6.3
  rectangle: 49.912,2.85 65.664,6.1
  region: 14.978,2.776 30.178,2.776 30.178,6.175 28.278,6.175 28.278,3.875 24.878,3.875 24.878,6.175 22.278,6.175 22.278,3.875 14.978,3.875
  region: 1.981,2.776 15.313,2.776 15.313,5.675 14.278,5.675 14.278,3.975 1.976,3.975
  region: 2.278,5.9 5.778,5.9 5.778,7.3 7.178,7.3 7.178,5.9 9.778,5.9 9.778,7.3 11.178,7.3 11.178,5.9 13.878,5.9 13.878,9 2.278,9
Mechanical 4:
  lines w0.2: 16.75,0.25 18.25,0.25 ; 17.5,-0.5 17.5,1 ; 46.75,0.25 48.25,0.25 ; 46.75,10.25 48.25,10.25 ; 47.5,-0.5 47.5,1 ; 47.5,9.5 47.5,11
Board:
  the board outline again, w0.2